# Altium PCB 18-GSM_GPRS (SIM808).PcbDoc
Units mm, origin at the board's own origin, x right, y up, seen from the top; angles counter-clockwise.
Board outline 40 x 40 mm, 4 copper layers (Top Layer, Internal Plane 1, Internal Plane 2, Bottom Layer), stack 0.462 mm thick; 29 components, 23 nets, 143 pads, 0 vias.
Unrouted connection lines stored in the file: 82.
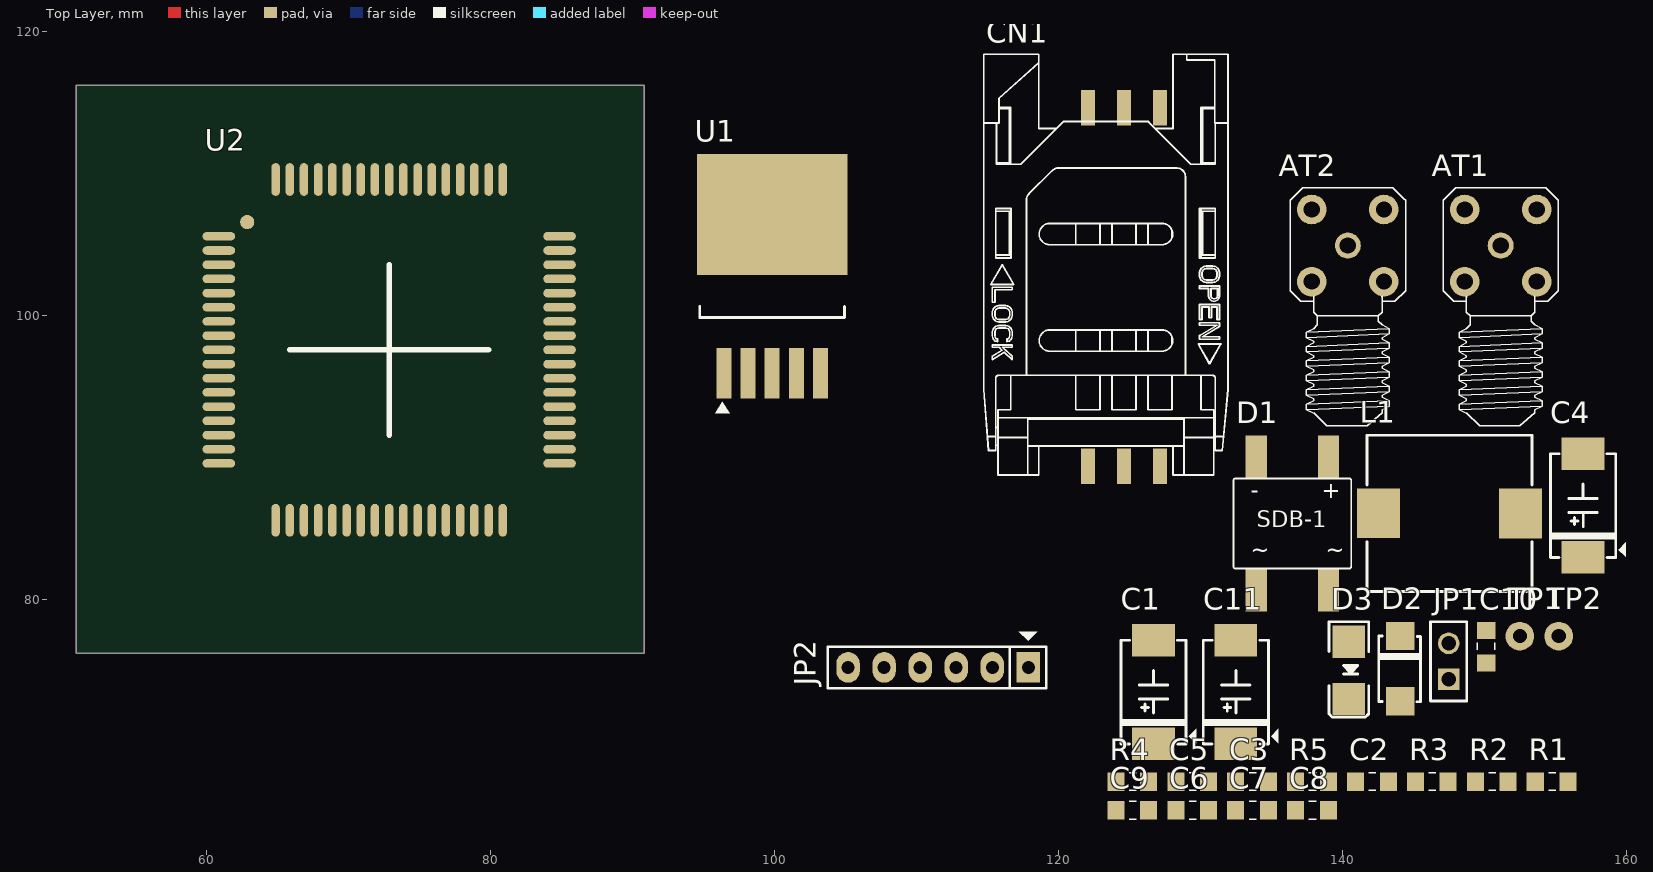
[diagram p0: Top Layer view]
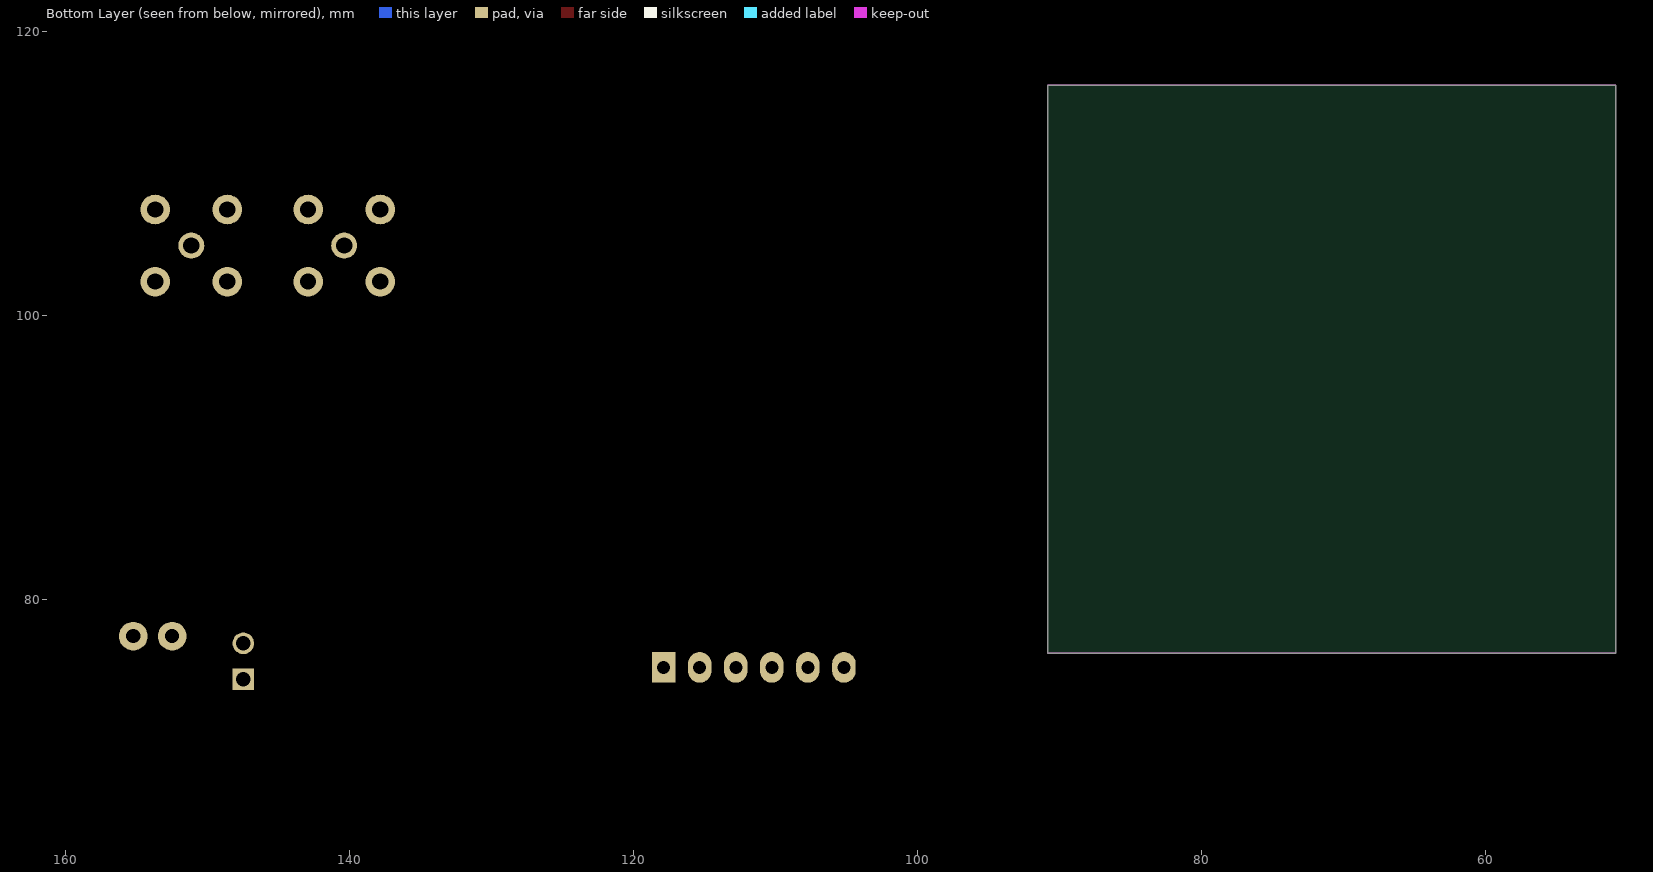
[diagram p1: Bottom Layer view, seen from below]
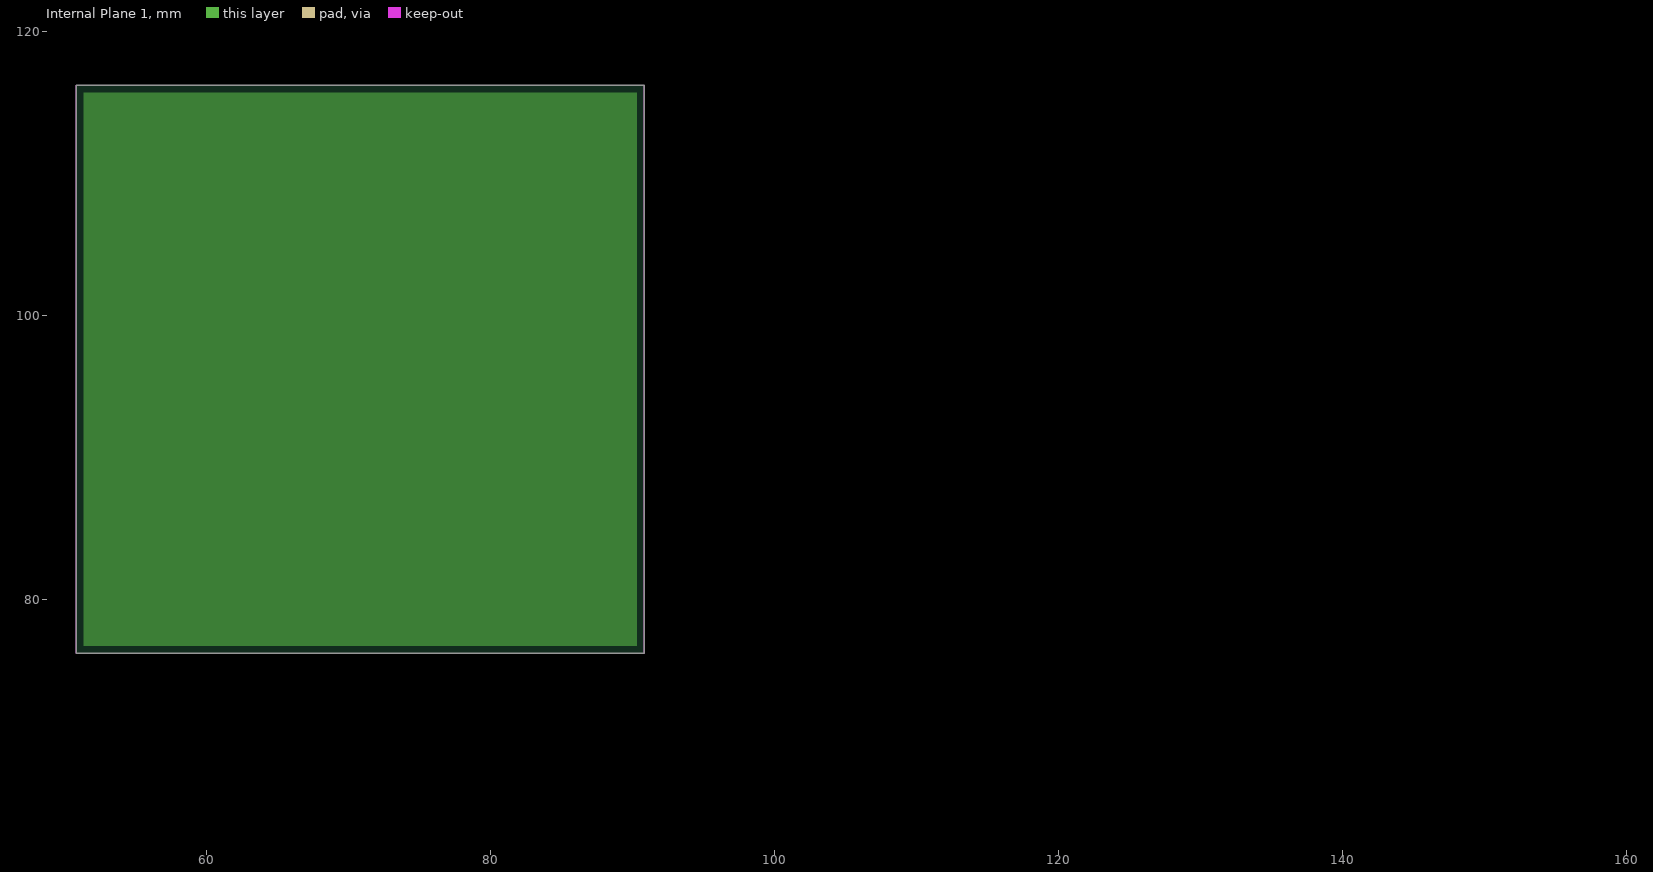
[diagram p2: Internal Plane 1, clearances drawn from the general rule]
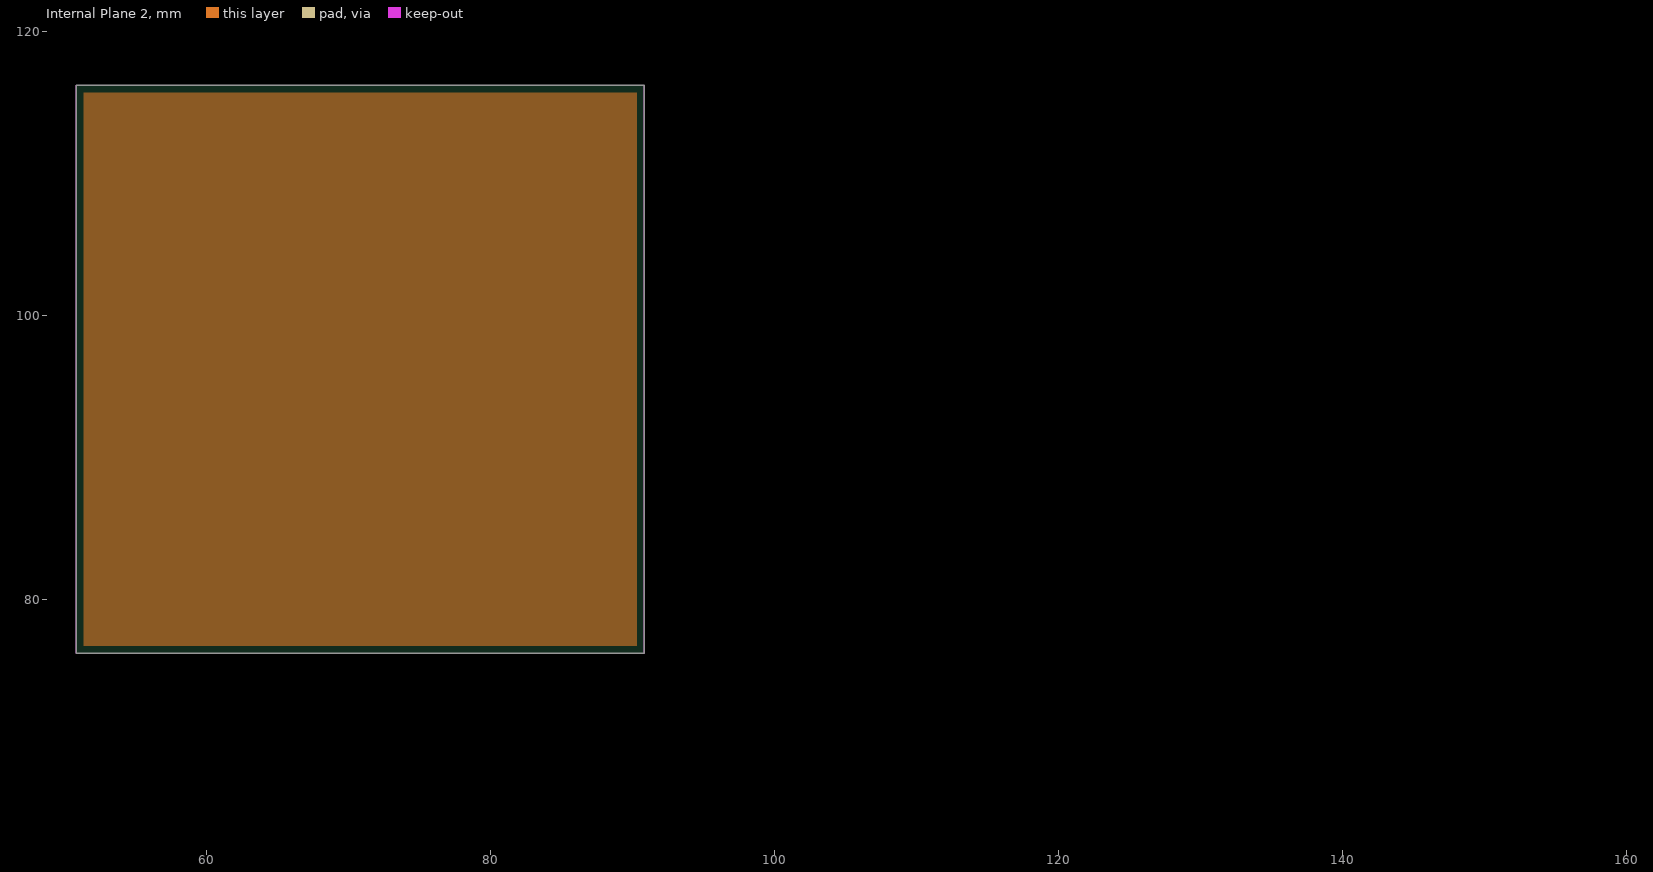
[diagram p3: Internal Plane 2, clearances drawn from the general rule]

## Layer stack, top to bottom
Top Solder: solder mask 0.0102, Solder Resist, Dk 3.5
Top Layer: signal copper 0.0356
Internal Plane 1: plane copper 0.0356
Internal Plane 2: plane copper 0.0356
Dielectric 1: dielectric 0.32, FR-4, Dk 4.8
Bottom Layer: signal copper 0.0356
Bottom Solder: solder mask 0.0102, Solder Resist, Dk 3.5

## Board outline
50.8,76.2 90.8,76.2 90.8,116.2 50.8,116.2

## Design rules (kind name [scope] priority, off if disabled: settings)
Clearance [All] p1: gap=0.2
PlaneClearance [All] p1: clearance=0.508
PlaneConnect [All] p1: planeconnectstyle=Relief reliefexpansion=0.508 reliefentries=4 reliefconductorwidth=0.254 reliefairgap=0.254
PolygonConnect [All] p1: connectstyle=Relief reliefconductorwidth=0.254 reliefentries=4 polygonreliefangle="90 Angle" airgapwidth=0.254
RoutingVias [All] p1: holewidth=0.6 width=1 viastyle="Through Hole" minholewidth=0.711 minwidth=1.27 maxholewidth=0.711 maxwidth=1.27
SolderMaskExpansion [All] p1: expansion=0.102
Width [All] p1: maxlimit=0.2 minlimit=0.2 preferedwidth=0.2
28 further rules are at their usual default settings.

## Components (designator, comment, footprint, x,y, rotation, side; value= is the part's Value field where it differs from the comment)
AT1 "GSM_ANT" SMA-RA 151.125,104.915 r0 top
AT2 "GPS_ANT" SMA-RA 140.356,104.915 r0 top
C1 "470uF/16V" C-TANT-7343 126.67,73.468 r90 top
C2 "100nF" CER-0805 142.014,67.159 r0 top
C3 "100nF" CER-0805 133.574,67.159 r0 top
C4 "470uF/16V" C-TANT-7343 156.923,86.606 r90 top
C5 "33pF" CER-0805 129.355,67.159 r0 top
C6 "10pF" CER-0805 129.355,65.148 r0 top
C7 "0.1nF" CER-0805 133.574,65.148 r0 top
C8 "1nF" CER-0805 137.794,65.148 r0 top
C9 "0.1nF" CER-0805 125.135,65.148 r0 top
C10 "1nF" CER-0805 150.091,76.624 r90 top
C11 "4.7uF/16V" C-TANT-7343 132.474,73.468 r90 top
CN1 "SIM6P" SK-SIM-C707A 124.587,101.981 r90 top
D1 "DB 1A" D-DB-1A-SMD 136.448,85.341 r0 top
D2 "SS34" DO-214AC 144.036,75.105 r90 top
D3 "1/2W 5V" DIO-SMD-106 140.432,74.989 r90 top
JP1 "JP2" JP2-C1T 147.461,74.358 r90 top
JP2 "JP6 PIN" JP6 117.856,75.203 r180 top
L1 "Inductor" SMD-L-X10-Y10-Z4 147.518,86.056 r0 top
R1 "2.2k" RES-0805 154.75,67.159 r0 top
R2 "1K" RES-0805 150.53,67.159 r0 top
R3 "100" RES-0805 146.31,67.159 r0 top
R4 "100" RES-0805 125.211,67.159 r0 top
R5 "4.7K" RES-0805 137.87,67.159 r0 top
TP1 "1" TP 152.468,77.401 r0 top
TP2 "1" TP 155.211,77.401 r0 top
U1 "LM2576HVS-ADJ" LM2576 99.809,102.108 r0 top
U2 "SIM808" GSM-SIM808 60.836,104.568 r0 top

## Footprints (in the part's own frame and the unit in brackets; to place one, negate y for a bottom-side part, rotate by r counter-clockwise, add the part's x,y. Pads: shape width x height; smd on the part's side, far side on the other; paste and mask are expansions set on the pad)
C-TANT-7343 [mm] "Tantalium Capacitor 7343-31"
  rect 2.3x3 smd: 1(-3.65,0) 2(3.65,0)
  silkscreen extent -3.65,-3 3.65,2.3, body extent -3.79,-2.3 3.81,2.3, height 3.1
CER-0805 [mm]
  rect 1.2x1.3 smd: 1(-1.116,0) 2(1.192,0)
  silkscreen extent -0.17,-0.63 0.33,0.63, body extent -0.97,-0.65 1.03,0.6, height 0.8
D-DB-1A-SMD [mm] "DB106S"
  rect 1.5x3 smd: 1(-2.55,-4.713) 2(2.55,-4.713) 3(2.55,4.713) 4(-2.55,4.713)
  silkscreen extent -4.15,-3.18 4.15,3.18, body extent -4.15,-4.95 4.15,4.95, height 3.35
DIO-SMD-106 [mil]
  rect 90x90.55 smd: 1(80,0) 2(-80,0)
  silkscreen extent -130,-55 135,55, body extent -99,-50 106,52, height 95
DO-214AC [mm] "Molded Capacitor, 2-Leads, Body 4.3x2.7mm, IPC Medium Density"
  rect 2x2 smd: 1(-2.287,0) 2(2.312,0)
  silkscreen extent -2.33,-1.45 2.3,1.5, body extent -2.77,-1.45 2.72,1.35, height 2.31
GSM-SIM808 [mm]
  oval 2.3x0.6 smd: 1(0,1) 2(0,0) 3(0,-1) 4(0,-2) 5(0,-3) 6(0,-4) 7(0,-5) 8(0,-6) 9(0,-7) 10(0,-8) 11(0,-9) 12(0,-10) 13(0,-11) 14(0,-12) 15(0,-13) 16(0,-14) 17(0,-15) 35(24,-15) 36(24,-14) 37(24,-13) 38(24,-12) 39(24,-11) 40(24,-10) 41(24,-9) 42(24,-8) 43(24,-7) 44(24,-6) 45(24,-5) 46(24,-4) 47(24,-3) 48(24,-2) 49(24,-1) 50(24,0) 51(24,1)
  oval 0.6x2.3 smd: 18(4,-19) 19(5,-19) 20(6,-19) 21(7,-19) 22(8,-19) 23(9,-19) 24(10,-19) 25(11,-19) 26(12,-19) 27(13,-19) 28(14,-19) 29(15,-19) 30(16,-19) 31(17,-19) 32(18,-19) 33(19,-19) 34(20,-19) 52(20,5) 53(19,5) 54(18,5) 55(17,5) 56(16,5) 57(15,5) 58(14,5) 59(13,5) 60(12,5) 61(11,5) 62(10,5) 63(9,5) 64(8,5) 65(7,5) 66(6,5) 67(5,5) 68(4,5)
  round 1 smd: ""(2,2)
  silkscreen extent 5,-13 19,-1, body extent 0,-19 24,5, height 3
JP2-C1T [mm] "2 row, straight, gold plating"
  rect 1.52x1.52 hole 1.02: 1(0,0)
  round 1.52 hole 1.02: 2(2.54,0)
  silkscreen extent -1.52,-1.27 4.06,1.27, body extent -1.52,-1.25 4.06,1.25, height 8.51
JP6 [mil] "JP6"
  rect 65x85 hole 36: 1(0,0)
  oval 65x85 hole 36: 2(100,0) 3(200,0) 4(300,0) 5(400,0) 6(500,0)
  silkscreen extent -50,-99 556,58, body extent -48,-50 548,48, height 323
LM2576 [mm] "D2-PAK, 6-Pads, Body 9.3x10.2mm (max), IPC Low Density"
  rect 1.05x3.55 smd: 1(-3.404,-6.2) 2(-1.702,-6.2) 3(0,-6.2) 4(1.702,-6.2) 5(3.404,-6.2)
  rect 10.6x8.5 smd: 6(0,5)
  silkscreen extent -5.1,-9 5.1,-1.49, body extent -5,-7.21 5,8.46, height 4.78
RES-0805 [mm]
  rect 1.2x1.3 smd: 1(-1.192,0) 2(1.116,0)
  silkscreen extent -0.25,-0.63 0.25,0.63, body extent -1.05,-0.62 0.95,0.63, height 0.5
SK-SIM-C707A [mm]
  rect 2.5x1 smd: 1(-12.624,-2.54) 2(-12.624,0) 3(-12.624,2.54) 5(12.624,-2.54) 6(12.624,0) 7(12.624,2.54)
  silkscreen extent -13.24,-7.33 16.41,9.87, body extent -13.23,-7.33 16.41,9.87, height 2.6
SMA-RA [mil]
  round 72 hole 45: 1(0,0)
  round 82 hole 45: 2(-100,-100) 3(100,-100) 4(100,100) 5(-100,100)
  silkscreen extent -160,-500 160,160, body extent -136,-457 139,137, height 394
SMD-L-X10-Y10-Z4 [mm] "SMD Inductor X-Size = Y-Size = 10mm"
  rect 3x3.5 smd: 1(-5,0) 2(5,-0.015)
  silkscreen extent -5.8,-5.5 5.8,5.5, body extent -5.61,-5.51 5.59,5.49, height 4.05
TP [mil] "Connect 1"
  round 80 hole 39: TP1(0,0)

## Part data
AT1 AT2: library part "CON Ant", "CONNECTOR ANTEN"
C1 C4 C11: library part Capacitor
C2 C3 C5 C6 C7 C8 C9 C10: library part Ceramic
D1: library part DB
D2: library part Diode
D3: library part "DIODE Zener", "Zenner"
JP1: "WR-PHD 2.54 mm Angled Socket Header"
JP2: library part JP6
R1 R2 R3 R4 R5: library part Res1/4W
TP1 TP2: library part TP, "CONNECT 1"
U1: library part LM2576HVS-5.0, "SIMPLE SWITCHER; 3A Step-Down Voltage Regulator"
U2: library part GSM-Sim808

## Nets (pads, with @x,y where several pads share a name; then routed paths per layer and width w, separated by ;. In a path a pad name is that pad's centre, name@x,y a point inside that pad or via, vN(x,y) a via of type N, cw(c..) or ccw(c..) an arc to the next point about the centre after c; other vN are vias at no path point)
+4V: C3.2 C4.1 C5.2 C6.2 D3.2 JP1.1 L1.2 R1.2 U2.4 U2.5 U2.6
+12V: C1.1 C2.2 D1.4 U1.1
AC1: D1.1 TP1.TP1
AC2: D1.2 TP2.TP1
GND: AT1.2 AT1.3 AT1.4 AT1.5 AT2.2 AT2.3 AT2.4 AT2.5 C1.2 C2.1 C3.1 C4.2 C5.1 C6.1 C7.1 C8.1 C9.1 C10.1 C11.2 CN1.5 D1.3 D2.1 D3.1 JP1.2 JP2.1 R2.1 U1.3 U1.5 U1.6 U2.1 U2.2 U2.3 U2.18 U2.28 U2.34 U2.36 U2.40 U2.51 U2.52 U2.54 U2.64 U2.65 U2.67 U2.68
GPS_ANT: C9.2 R4.2 U2.35
GSM_ANT: C7.2 R3.2 U2.66
NetAT1_1: AT1.1 C8.2 R3.1
NetAT2_1: AT2.1 C10.2 R4.1
NetC11_1: C11.1 U2.17
NetD2_2: D2.2 L1.1 U1.2
NetR1_1: R1.1 R2.2 U1.4
NetR5_1: R5.1 U2.7
PWRKEY: JP2.4 U2.8
RST: JP2.5 U2.16
RXD: JP2.3 U2.15
S-CLK: CN1.3 U2.31
S-DATA: CN1.7 U2.30
S-DET: R5.2 U2.33
S-RST: CN1.2 U2.32
S-VDD: CN1.1 U2.29
SLEEP: JP2.6 U2.9
TXD: JP2.2 U2.14
pads on no net: CN1.6 U2. U2.10 U2.11 U2.12 U2.13 U2.19 U2.20 U2.21 U2.22 U2.23 U2.24 U2.25 U2.26 U2.27 U2.37 U2.38 U2.39 U2.41 U2.42 U2.43 U2.44 U2.45 U2.46 U2.47 U2.48 U2.49 U2.50 U2.53 U2.55 U2.56 U2.57 U2.58 U2.59 U2.60 U2.61 U2.62 U2.63

## Keep-outs
Keep-Out Layer:
  the board outline again, w0

## Dimensions
50.8,76.2 to 90.8,76.2 on Mechanical 1
50.8,76.2 to 50.8,116.2 on Mechanical 1

## Text inside footprints (layer, text, board x,y; h text height)
D1: Top Overlay "~        ~" at 133.527,82.547 h2; Top Overlay "-         +" at 133.527,86.738 h2; Top Overlay "SDB-1" at 133.941,84.701 h2